# EAGLE board DAq2017 (EAGLE 7.2.0)
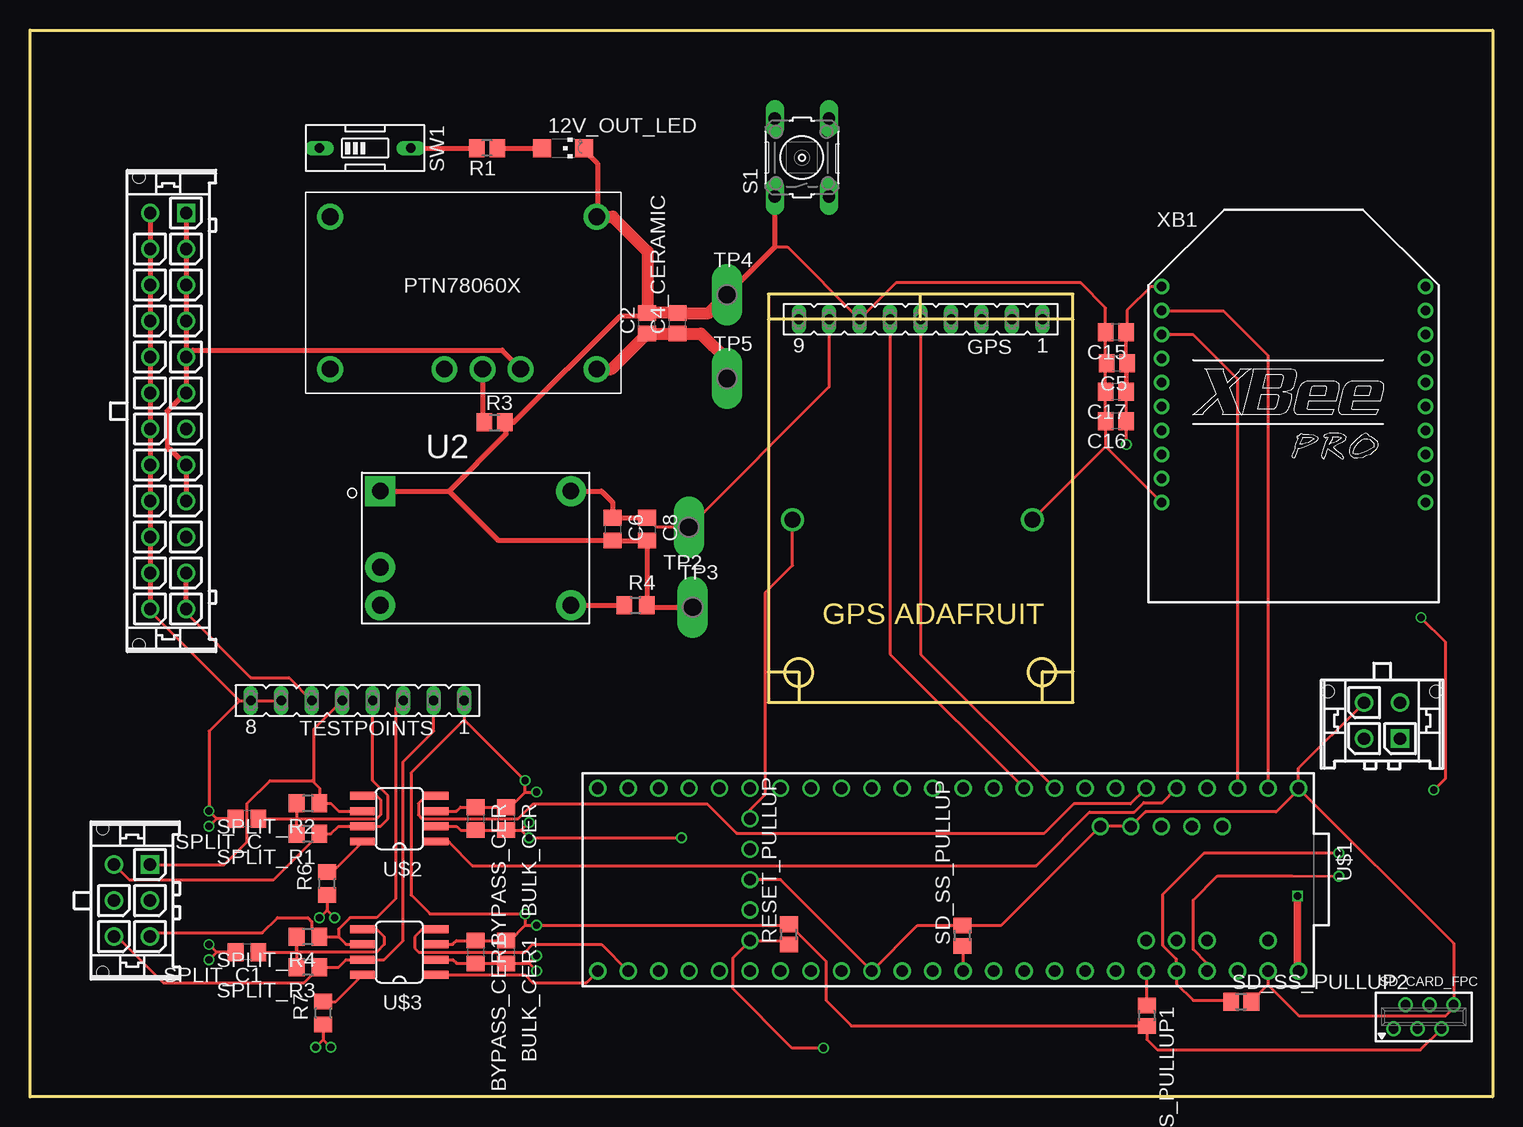
[diagram p0: board, top side]
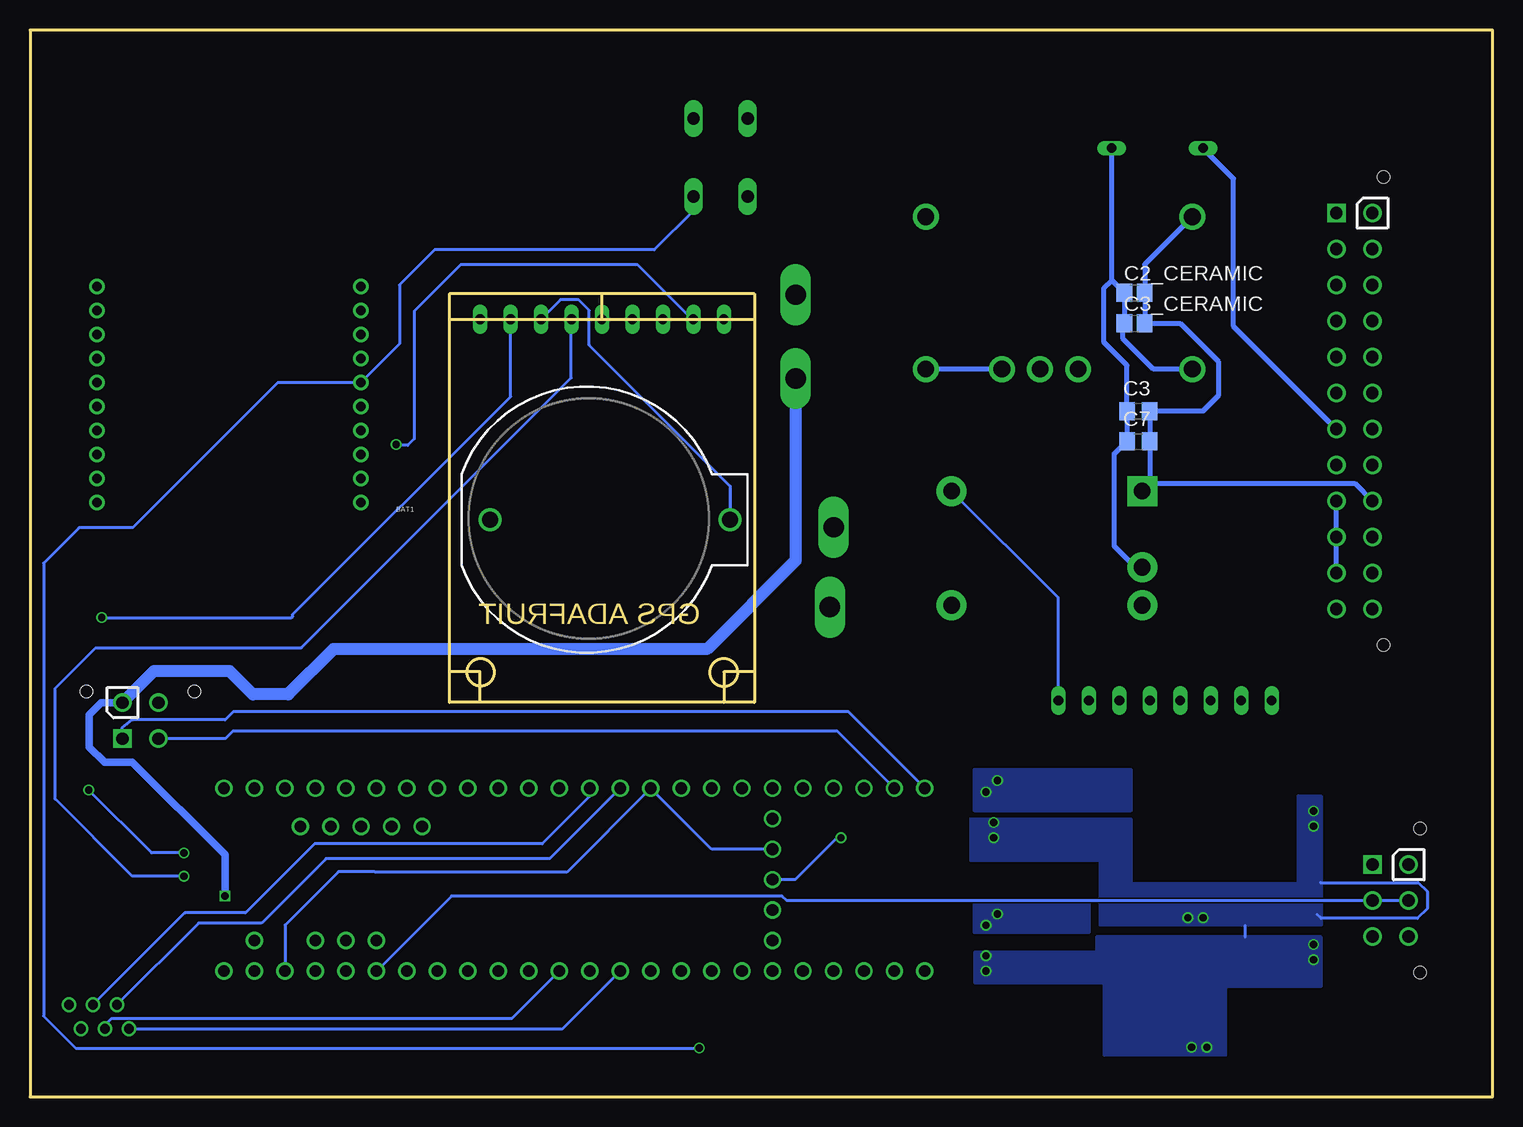
[diagram p1: board, bottom side, seen from below]

Size 121.92 x 88.9 mm. Coordinates in mm from the lower left corner, seen from the top.
Outline: 61.54,64.8 61.54,66.9 74.24,66.9
Outline: 61.54,64.8 61.54,32.87 86.94,32.87 86.94,64.8
Outline: 86.94,64.8 86.94,66.9 74.24,66.9
Outline: 86.94,64.8 61.54,64.8
Outline: 74.24,64.77 74.24,66.9
Outline: 84.4,32.89 84.4,35.43 86.94,35.43
Outline: 61.54,35.41 64.08,35.41 64.08,32.87
Outline: 0,0 0,88.9 121.92,88.9 121.92,0 0,0
Outline: circle at 64.08,35.36 radius 1.14
Outline: circle at 84.35,35.38 radius 1.14
Copper layers (1*16): Top 0.035mm / dielectric 1.5mm / Bottom 0.035mm
Design rules "PCB_Power": minimum track width 5mil, minimum drill 10mil, track to track 5mil, track to pad 5mil, pad to pad 5mil, via to via 5mil, smd to smd 5mil, copper to edge 10mil, drill to drill 6mil, minimum pad ring 5mil, minimum via ring 5mil, stop-mask expansion 3mil, vias tented up to drill 0mil, thermal gap 10mil

## Footprints (pad centres in the part's own frame; a part is rotated, then mirrored left to right if it is on the bottom)
CHIPLED_1206 = smd 1.5 x 1.5: A 0,-1.75; C 0,1.75
BATTCOM_20MM_PTH = drill 1.3: 1 11.85,0; 2 -8.15,0
C0805 = smd 1.3 x 1.5: 1 -0.95,0; 2 0.95,0
C0805' = smd 1.3 x 1.5: 1 -0.85,0; 2 0.85,0
FE09 = drill 0.813 long: 1 -10.16,0; 2 -7.62,0; 3 -5.08,0; 4 -2.54,0; 5 0,0; 6 2.54,0; 7 5.08,0; 8 7.62,0; 9 10.16,0
43045-0612 = drill 1.02 square: P$1 3,0 | drill 1.02: P$2 0,0; P$3 -3,0; P$4 3,3; P$5 0,3; P$6 -3,3 | hole 1.02: 6,3.94; -6,3.94
43045-0412 = drill 1.02 square: P$1 1.5,0 | drill 1.02: P$2 -1.5,0; P$3 1.5,3; P$4 -1.5,3 | hole 1.02: 4.5,3.94; -4.5,3.94
43045-2412 = drill 1.02 square: P$1 16.5,0 | drill 1.02: P$2 13.5,0; P$3 10.5,0; P$4 7.5,0; P$5 4.5,0; P$6 1.5,0; P$7 -1.5,0; P$8 -4.5,0; P$9 -7.5,0; P$10 -10.5,0; P$11 -13.5,0; P$12 -16.5,0; P$13 16.5,3; P$14 13.5,3; P$15 10.5,3; P$16 7.5,3; P$17 4.5,3; P$18 1.5,3; P$19 -1.5,3; P$20 -4.5,3; P$21 -7.5,3; P$22 -10.5,3; P$23 -13.5,3; P$24 -16.5,3 | hole 1.02: 19.5,3.94; -19.5,3.94
R0805 = smd 1.3 x 1.5: 1 -0.85,0; 2 0.85,0
R0805' = smd 1.3 x 1.5: 1 -0.95,0; 2 0.95,0
B3F-10XX = drill 1.016 long: 1 -3.251,2.261; 2 3.251,2.261; 3 -3.251,-2.261; 4 3.251,-2.261
FH21-6S-1DSA = drill 0.813: 1 -2.5,-1; 2 -1.5,1; 3 -0.5,-1; 4 0.5,1; 5 1.5,-1; 6 2.5,1
EDG-01 = drill 0.813 long: 1 0,-3.81; 2 0,3.81
FE08 = drill 0.813 long: 1 -8.89,0; 2 -6.35,0; 3 -3.81,0; 4 -1.27,0; 5 1.27,0; 6 3.81,0; 7 6.35,0; 8 8.89,0
P1-17Y = drill 1.702 pad 2.121 long: TP 0,0
TI_PTN78000WAH = drill 1.4 pad 2.5 square: 1 -7.94,4.763 | drill 1.4 pad 2.5: 2 -7.94,-1.587; 3 -7.94,-4.763; 4 7.94,-4.763; 5 7.94,4.763
TEENSY_3.6_ALL_PINS = drill 0.965: 0 -7.62,25.4; 1 -7.62,22.86; 2 -7.62,20.32; 3 -7.62,17.78; 3.3V 7.62,22.86; 3.3V3 -7.62,-7.62; 3.3V4 -2.54,-17.78; 4 -7.62,15.24; 5 -7.62,12.7; 6 -7.62,10.16; 7 -7.62,7.62; 8 -7.62,5.08; 9 -7.62,2.54; 10 -7.62,0; 11 -7.62,-2.54; 12 -7.62,-5.08; 13 7.62,-5.08; 14/A0 7.62,-2.54; 15/A1 7.62,0; 16/A2 7.62,2.54; 17/A3 7.62,5.08; 18/A4 7.62,7.62; 19/A5 7.62,10.16; 20/A6 7.62,12.7; 21/A7 7.62,15.24; 22/A8 7.62,17.78; 23/A9 7.62,20.32; 24 -7.62,-10.16; 25 -7.62,-12.7; 26 -7.62,-15.24; 27 -7.62,-17.78; 28 -7.62,-20.32; 29 -7.62,-22.86; 30 -7.62,-25.4; 31/A12 -7.62,-27.94; 32/A13 -7.62,-30.48; 33/A14 7.62,-30.48; 34/A15 7.62,-27.94; 35/A16 7.62,-25.4; 36/A17 7.62,-22.86; 37/A18 7.62,-20.32; 38/A19 7.62,-17.78; 39/A20 7.62,-15.24; A10 5.08,17.78; A11 5.08,15.24; A21 7.62,-12.7; A22 7.62,-10.16; AGND 7.62,25.4; AREF 5.08,20.32; D+ -4.445,16.51; D- -4.445,19.05; GND -7.62,27.94; GND1 7.62,-7.62; GND3 -4.445,13.97; GND4 -4.445,11.43; GND6 0,-17.78; PGM 2.54,-17.78; RESET 5.08,-17.78; VBAT -5.08,-17.78; VIN 7.62,27.94; VUSB 5.08,25.4; VUSB1 -4.445,21.59
SO8 = smd 0.66 x 2.032: 1 -1.905,-3.073; 2 -0.635,-3.073; 3 0.635,-3.073; 4 1.905,-3.073; 5 1.905,3.073; 6 0.635,3.073; 7 -0.635,3.073; 8 -1.905,3.073
PTN78060X_TH = drill 1.397 pad 2.159: 1 -11.176,6.35; 2 -11.176,-6.35; 3 -1.651,-6.35; 4 1.524,-6.35; 5 4.699,-6.35; 6 11.049,-6.35; 7 11.049,6.35
XBEE-PRO = drill 0.8 pad 1.27: 1 -11,9; 2 -11,7; 3 -11,5; 4 -11,3; 5 -11,1; 6 -11,-1; 7 -11,-3; 8 -11,-5; 9 -11,-7; 10 -11,-9; 11 11,-9; 12 11,-7; 13 11,-5; 14 11,-3; 15 11,-1; 16 11,1; 17 11,3; 18 11,5; 19 11,7; 20 11,9

## Placement (x,y rotation side)
12V_OUT_LED  [CHIPLED_1206]  44.45,79.06 270 top
BAT1  [BATTCOM_20MM_PTH]  75.41,48.09 0 bottom
BULK_CER  10uF  [C0805]  39.69,23.18 270 top
BULK_CER1  10uF  [C0805]  39.69,12.06 270 top
BYPASS_CER  100nF  [C0805]  37.15,23.18 270 top
BYPASS_CER1  100nF  [C0805]  37.15,12.06 270 top
C2  100uF  [C0805']  51.44,64.45 90 top
C2_CERAMIC  2.2uF  [C0805']  29.84,66.99 0 bottom
C3  2.2uF  [C0805]  29.53,57.15 0 bottom
C3_CERAMIC  1uF  [C0805']  29.84,64.45 0 bottom
C4_CERAMIC  2.2uF  [C0805']  53.98,64.45 90 top
C5  1uF  [C0805']  90.61,61.11 180 top
C6  100uF  [C0805]  48.58,47.31 270 top
C7  1uF  [C0805]  29.53,54.61 0 bottom
C8  2.2uF  [C0805]  51.44,47.31 270 top
C15  8.2pF  [C0805']  90.51,63.71 180 top
C16  100nF  [C0805']  90.51,56.31 180 top
C17  100nF  [C0805']  90.51,58.76 180 top
GPS  [FE09]  74.24,64.8 180 top
HARNESS  [43045-0612]  10,16.36 90 top
LCD  [43045-0412]  112.71,29.84 0 top
POWER_CONNECTOR  [43045-2412]  13.02,57.15 90 top
R1  1k  [R0805]  38.1,79.06 180 top
R3  21k  [R0805]  38.73,56.2 0 top
R4  78.7k  [R0805']  50.48,40.96 0 top
R6  4K7  [R0805']  24.77,17.78 90 top
R7  4K7  [R0805']  24.45,6.99 90 top
RESET_PULLUP  4K7  [R0805]  63.26,13.53 90 top
S1  [B3F-10XX]  64.35,78.27 90 top
SD_CARD_FPC  FH21-6S-1DSA  [FH21-6S-1DSA]  116.17,6.67 0 top
SD_SS_PULLUP  4K7  [R0805]  77.72,13.43 90 top
SD_SS_PULLUP1  4K7  [R0805]  93.09,6.76 270 top
SD_SS_PULLUP2  4K7  [R0805]  100.97,7.94 0 top
SPLIT_C  4n7F  [C0805]  18.1,23.18 180 top
SPLIT_C1  4n7F  [C0805]  18.1,12.06 180 top
SPLIT_R1  60E  [R0805']  23.18,21.91 180 top
SPLIT_R2  60E  [R0805']  23.18,24.45 180 top
SPLIT_R3  60E  [R0805']  23.18,10.79 180 top
SPLIT_R4  60E  [R0805']  23.18,13.34 180 top
SW1  [EDG-01]  27.94,79.06 270 top
TESTPOINTS  [FE08]  27.3,33.02 180 top
TP2  TPPAD1-17Y  [P1-17Y]  54.93,47.47 180 top
TP3  TPPAD1-17Y  [P1-17Y]  55.24,40.8 0 top
TP4  TPPAD1-17Y  [P1-17Y]  58.1,66.83 0 top
TP5  TPPAD1-17Y  [P1-17Y]  58.1,59.85 0 top
U2  PTN78000WAH  [TI_PTN78000WAH]  37.15,45.72 0 top
U$1  TEENSY_3.6_ALL_PINS  [TEENSY_3.6_ALL_PINS]  77.8,18.09 270 top
U$2  SN65HVD230/1  [SO8]  30.8,23.18 90 top
U$3  SN65HVD230/1  [SO8]  30.8,12.06 90 top
U$4  PTN78060XTH  [PTN78060X_TH]  36.2,66.99 0 top
XB1  XBEE-PRO  [XBEE-PRO]  105.34,58.52 0 top

## Library data of the parts
12V_OUT_LED = led
BAT1 = SparkFun-Electromechanical
BULK_CER BULK_CER1 BYPASS_CER BYPASS_CER1 R6 R7 SPLIT_C SPLIT_C1 SPLIT_R1-SPLIT_R4 = LV
C2 C2_CERAMIC C3_CERAMIC C4_CERAMIC R1 R3 RESET_PULLUP SD_SS_PULLUP SD_SS_PULLUP1 SD_SS_PULLUP2 = resistor
C3 C6-C8 R4 = rcl
C5 C15-C17 = Ediff+DAQ_v2
GPS TESTPOINTS = con-lsta; OC_FARNELL: unknown; OC_NEWARK: unknown
HARNESS LCD POWER_CONNECTOR = con-molex-micro-fit-3_0
S1 = switch-omron; MPN: B3F-1000; OC_FARNELL: 176432; OC_NEWARK: 36M3542
SD_CARD_FPC = con-hirose; OC_FARNELL: unknown; OC_NEWARK: unknown
SW1 = special
TP2-TP5 = testpad
U2 = PTN78000WAH; MPN: PTN78000WAH; OC_FARNELL: 1564908; OC_NEWARK: 65J6317; PACKAGE: Through-Hole Module; SUPPLIER: TEXAS INSTRUMENTS
U$1 = Teensy_3_and_LC_Series_Boards_v1.4
U$2 U$3 = texas_1
U$4 = PTN780XX
XB1 = Ediff+DAQ_v2; MPN: XBP24-AWI-001; OC_FARNELL: 1337916; OC_NEWARK: 42M2667

## Nets
3.3V: U$1.3.3V U$1.3.3V3 U$1.3.3V4
3V3: BULK_CER1.1 BULK_CER.1 BYPASS_CER1.1 BYPASS_CER.1 C5.1 C6.1 C8.1 C15.1 C16.1 C17.1 GPS.8 RESET_PULLUP.2 SD_CARD_FPC.5 SD_SS_PULLUP1.2 TESTPOINTS.1 TP2.TP U2.5 U$2.3 U$3.3 XB1.1
3V3_OUT_GPS: GPS.1
5V: C2.1 C4_CERAMIC.1 LCD.P$3 POWER_CONNECTOR.P$1 POWER_CONNECTOR.P$2 POWER_CONNECTOR.P$3 POWER_CONNECTOR.P$4 POWER_CONNECTOR.P$5 POWER_CONNECTOR.P$6 POWER_CONNECTOR.P$8 POWER_CONNECTOR.P$9 POWER_CONNECTOR.P$10 POWER_CONNECTOR.P$11 POWER_CONNECTOR.P$12 TESTPOINTS.6 TP5.TP U$1.VIN U$4.5 U$4.6
12V: C2_CERAMIC.1 C3.1 C3_CERAMIC.1 C7.1 R1.2 SW1.2 U2.2 U$4.2
12V_IN: POWER_CONNECTOR.P$7 SW1.1
AREF: U$1.AREF
GND: 12V_OUT_LED.C BAT1.2 BULK_CER1.2 BULK_CER.2 BYPASS_CER1.2 BYPASS_CER.2 C2.2 C2_CERAMIC.2 C3.2 C3_CERAMIC.2 C4_CERAMIC.2 C5.2 C6.2 C7.2 C8.2 C15.2 C16.2 C17.2 GPS.7 LCD.P$4 POWER_CONNECTOR.P$13 POWER_CONNECTOR.P$14 POWER_CONNECTOR.P$15 POWER_CONNECTOR.P$16 POWER_CONNECTOR.P$17 POWER_CONNECTOR.P$18 POWER_CONNECTOR.P$19 POWER_CONNECTOR.P$20 POWER_CONNECTOR.P$21 POWER_CONNECTOR.P$22 POWER_CONNECTOR.P$23 POWER_CONNECTOR.P$24 R3.2 R4.2 R6.1 R7.1 S1.1 SD_CARD_FPC.6 SD_SS_PULLUP2.2 SD_SS_PULLUP.2 SPLIT_C1.2 SPLIT_C.2 TESTPOINTS.7 TESTPOINTS.8 TP3.TP TP4.TP U2.1 U$1.AGND U$1.GND U$1.GND1 U$1.GND3 U$1.GND4 U$1.GND6 U$2.2 U$3.2 U$4.1 U$4.7 XB1.10
GPS_EN: GPS.2 SD_SS_PULLUP2.1 U$1.22/A8
GPS_FIX: GPS.4 U$1.23/A9
GPS_PPS: GPS.9
GPS_RX: GPS.6 U$1.8
GPS_TX: GPS.5 U$1.7
LCD_RX: LCD.P$1 U$1.32/A13
LCD_TX: LCD.P$2 U$1.31/A12
LULZ: R6.2 U$2.8
MC_CAN_H: HARNESS.P$6 SPLIT_R3.1 TESTPOINTS.2 U$3.7
MC_CAN_L: HARNESS.P$3 SPLIT_R4.1 TESTPOINTS.3 U$3.6
MC_RX: U$1.34/A15 U$3.4
MC_TX: U$1.33/A14 U$3.1
N$2: R3.1 U$4.4
N$3: R4.1 U2.4
N$5: 12V_OUT_LED.A R1.1
N$6: R7.2 U$3.8
N$7: SPLIT_C1.1 SPLIT_R3.2 SPLIT_R4.2 U$3.5
N$9: SPLIT_C.1 SPLIT_R1.2 SPLIT_R2.2 U$2.5
RESET: RESET_PULLUP.1 S1.3 U$1.RESET XB1.5
RESET_CAN_NODE: HARNESS.P$5 SD_SS_PULLUP1.1 U$1.21/A7
RTC: BAT1.1 GPS.3 U$1.VBAT
SD_MISO: SD_CARD_FPC.2 U$1.12
SD_MOSI: SD_CARD_FPC.4 U$1.11
SD_SCLK: SD_CARD_FPC.1 U$1.13
SD_SS: SD_CARD_FPC.3 SD_SS_PULLUP.1 U$1.15/A1
SENSOR_CAN_H: HARNESS.P$4 SPLIT_R1.1 TESTPOINTS.4 U$2.7
SENSOR_CAN_L: HARNESS.P$1 SPLIT_R2.1 TESTPOINTS.5 U$2.6
SENSOR_RX: U$1.4 U$2.4
SENSOR_TX: U$1.3 U$2.1
SLEEP_OUT: XB1.13
VUSB: U$1.VUSB
VUSB1: U$1.VUSB1
XBEE_RX: U$1.1 XB1.3
XBEE_TX: U$1.0 XB1.2

## Tracks (layer width: path | path; a pad name or v marks a point on that pad's centre or on a via)
3.3V
  Bottom 0.254: U$1.3.3V4 65.1,20.63 U$1.3.3V3 77.16,18.73 93.19,18.73 93.22,18.76 96.2,18.76 100.66,14.3 U$1.3.3V
3V3  (via drill 0.6)
  Top 0.254: U$2.3 35.56,23.81 35.88,24.13 BYPASS_CER.1 BULK_CER.1 40,24.13 41.27,25.4 | 41.27,25.4 v42.23,25.4 | 41.27,25.4 v41.27,26.35 36.2,31.43 | U$3.3 35.24,12.7 35.56,13.02 BYPASS_CER1.1 BULK_CER1.1 40,13.02 41.27,14.29 | 41.27,14.29 v41.27,15.24 33.34,15.24 31.75,16.83 31.75,26.99 36.2,31.43 | 41.27,14.29 v42.23,14.29 63.17,14.29 RESET_PULLUP.2 66.36,11.28 66.36,8.03 68.48,5.91 SD_SS_PULLUP1.2 93.09,4.79 93.98,3.9 115.91,3.9 SD_CARD_FPC.5 | TESTPOINTS.1 36.2,31.43 | C15.1 91.36,61.2 C5.1 91.46,58.85 C17.1 | C17.1 C16.1 91.41,56.27 v91.41,54.36 | GPS.8 66.62,59.16 TP2.TP 52.23,47.47 C8.1 | C17.1 C15.1 | 90.93,64.14 C15.1 | XB1.1 93.42,67.52 91.44,65.53 91.44,63.79 C15.1
  Top 0.406: C8.1 C6.1 48.58,49.53 47.62,50.48 U2.5
  Bottom 0.254: TESTPOINTS.1 36.2,41.59 U2.5 | GPS.8 66.73,64.8 71.28,69.34 86.01,69.34 89.88,65.47 89.88,54.83 90.42,54.29 91.34,54.29 v91.41,54.36
  pour Bottom: 30.16,23.81 43.18,23.81 43.18,27.3 30.16,27.3
  pour Bottom: 33.66,17.78 33.66,13.65 43.18,13.65 43.18,17.78
5V  (via drill 0.6)
  Top 0.254: POWER_CONNECTOR.P$12 13.02,40.32 18.41,34.92 21.59,34.92 TESTPOINTS.6
  Top 0.406: POWER_CONNECTOR.P$1 POWER_CONNECTOR.P$2 POWER_CONNECTOR.P$3 POWER_CONNECTOR.P$4 POWER_CONNECTOR.P$5 | POWER_CONNECTOR.P$5 POWER_CONNECTOR.P$6 12.93,58.65 11.43,57.15 11.43,53.98 11.69,53.98 POWER_CONNECTOR.P$8 POWER_CONNECTOR.P$9 | POWER_CONNECTOR.P$12 POWER_CONNECTOR.P$11 | POWER_CONNECTOR.P$5 13.6,62.23 39.37,62.23 40.89,60.71 U$4.5 | TP5.TP
  Top 0.61: U$1.VIN 105.66,10.55 v105.66,16.73
  Top 1.016: U$4.6 48.48,60.64 C2.1 C4_CERAMIC.1 55.94,63.6 58.13,61.4 58.13,59.88 TP5.TP
  Bottom 0.406: POWER_CONNECTOR.P$11 POWER_CONNECTOR.P$10 POWER_CONNECTOR.P$9 | U$4.5 U$4.6
  Bottom 0.61: v105.66,16.73 105.66,20.16 113.38,27.88 115.7,27.88 116.97,29.15 116.97,31.84 115.98,32.83 114.23,32.83 LCD.P$3
  Bottom 1.016: TP5.TP 58.1,44.7 65.5,37.31 96.61,37.31 100.39,33.53 103.35,33.53 105.28,35.47 111.59,35.47 LCD.P$3
12V
  Top 0.406: SW1.2 R1.2
  Bottom 0.406: 31.75,68.05 C2_CERAMIC.1 C3_CERAMIC.1 | 31.75,68.05 SW1.2 | 30.48,64.23 C3_CERAMIC.1 | 31.75,68.05 32.38,67.41 32.38,62.87 30.48,60.96 C3.1 C7.1 31.56,53.53 31.56,45.91 29.78,44.13 U2.2 | U$4.2 28.26,60.64 30.8,63.18 30.8,64.35 C3_CERAMIC.1
12V_IN
  Bottom 0.406: POWER_CONNECTOR.P$7 21.59,64.22 21.59,76.52 SW1.1
GND  (via drill 0.6)
  Top 0.254: BYPASS_CER.2 35.88,22.23 35.56,22.54 U$2.2 | BYPASS_CER.2 BULK_CER.2 | 15.56,23.18 v14.92,23.81 14.92,30.48 17.46,33.02 | SPLIT_C.2 15.56,23.18 | 15.56,23.18 v14.92,22.54 | 24.77,15.56 v24.13,14.92 | R6.1 24.77,15.56 | 24.77,15.56 v25.4,14.92 | BULK_CER1.2 BYPASS_CER1.2 | BYPASS_CER1.2 35.56,11.11 35.24,11.43 U$3.2 | SPLIT_C1.2 15.56,12.06 | v14.92,12.7 15.56,12.06 | 15.56,12.06 v14.92,11.43 | R7.1 24.45,4.76 | v23.81,4.13 24.45,4.76 | 24.45,4.76 v25.08,4.13 | BYPASS_CER.2 40.96,22.23 | v41.59,22.86 40.96,22.23 | 40.96,22.23 v41.59,21.59 v54.32,21.59 | BYPASS_CER1.2 41.59,11.11 | v42.23,11.75 41.59,11.11 | 41.59,11.11 v42.23,10.48 | POWER_CONNECTOR.P$24 10.02,40.47 17.46,33.02 | 17.46,33.02 TESTPOINTS.8 TESTPOINTS.7 | 62.09,70.82 63.14,70.82 GPS.7 72.19,67.82 87.6,67.82 89.66,65.75 C15.2 89.66,61.2 C5.2 89.66,61.02 C17.2 C16.2 89.66,54.2 | 89.66,54.2 XB1.10 | 89.66,54.2 89.66,54.19 BAT1.2 | U$1.GND 105.74,27.38 LCD.P$4 | U$1.GND 105.74,25.61 103.89,23.75 92.98,23.75 U$1.GND3 U$1.GND4 80.97,14.28 SD_SS_PULLUP.2 73.99,14.28 U$1.GND1 62.56,18.09 U$1.GND6 | 103.2,9.32 U$1.AGND 103.2,9.51 | 103.2,9.32 SD_SS_PULLUP2.2 | 103.2,9.32 105.79,6.74 105.79,6.73 117.98,6.73 118.67,7.42 SD_CARD_FPC.6 118.67,12.78 U$1.GND
  Top 0.406: POWER_CONNECTOR.P$13 POWER_CONNECTOR.P$14 POWER_CONNECTOR.P$15 POWER_CONNECTOR.P$16 POWER_CONNECTOR.P$17 POWER_CONNECTOR.P$18 POWER_CONNECTOR.P$19 POWER_CONNECTOR.P$20 POWER_CONNECTOR.P$21 POWER_CONNECTOR.P$22 POWER_CONNECTOR.P$23 POWER_CONNECTOR.P$24 | 12V_OUT_LED.C 46.2,78.89 47.31,77.79 47.31,73.41 U$4.7 | U2.1 34.92,50.48 | C2.2 51.22,65.09 49.21,65.09 40.32,56.2 R3.2 39.69,56.09 39.69,55.24 34.92,50.48 | 34.92,50.48 39.05,46.36 C6.2 C8.2 R4.2 51.59,40.8 TP3.TP | TP4.TP 62.09,70.82 S1.1
  Top 1.016: U$4.7 48.58,73.34 51.5,70.42 51.5,65.37 | 51.5,65.37 C2.2 | 51.5,65.37 53.91,65.37 C4_CERAMIC.2 56.57,65.3 TP4.TP
  Bottom 0.254: 20.64,14.29 20.64,13.34 | 14.64,15.21 14.29,14.86 6.25,14.86 5.46,15.65 5.46,17.11 6.19,17.84 14.35,17.84 | U$1.GND6 58.13,18.1 54.64,21.59 v54.32,21.59
  Bottom 0.406: POWER_CONNECTOR.P$21 11.48,51.12 28.57,51.12 U2.1 28.58,51.11 C7.2 C3.2 24.13,57.15 22.86,58.42 22.86,61.28 26.04,64.45 C3_CERAMIC.2 C2_CERAMIC.2 29,69.37 U$4.1
  pour Bottom: 43.5,23.18 30.16,23.18 30.16,17.78 16.19,17.78 16.19,25.08 14.29,25.08 14.29,14.29 32.7,14.29 32.7,19.68 43.5,19.68
  pour Bottom: 14.29,13.34 33.02,13.34 33.02,12.06 43.18,12.06 43.18,9.53 32.38,9.53 32.38,3.49 22.23,3.49 22.23,9.21 14.29,9.21
GPS_EN  (via drill 0.6)
  Top 0.254: SD_SS_PULLUP2.1 100.02,8.03 96.97,8.03 95.58,9.41 U$1.22/A8 95.58,11.48 94.46,12.61 94.46,16.89 97.89,20.32 v109.09,20.32 | v115.95,39.94 117.98,37.91 117.98,26.51 v117.03,25.56
  Bottom 0.254: GPS.2 81.85,64.78 81.85,58.36 100.01,40.2 100.01,40.04 100.11,39.94 v115.95,39.94 | v117.03,25.56 111.79,20.32 v109.09,20.32
GPS_FIX  (via drill 0.6)
  Top 0.254: U$1.23/A9 98.12,11.13 96.97,12.29 96.97,16.38 99,18.41 105.22,18.41 v109.09,18.38
  Bottom 0.254: GPS.4 76.8,64.78 76.8,59.91 99.31,37.4 116.46,37.4 119.83,34.04 119.83,24.83 113.38,18.38 v109.09,18.38
GPS_RX
  Top 0.254: GPS.6 71.7,36.89 U$1.8
GPS_TX
  Top 0.254: GPS.5 74.24,36.89 U$1.7
LCD_RX
  Bottom 0.254: LCD.P$1 114.21,30.76 113.38,31.4 105.66,31.4 105,32.07 53.68,32.07 U$1.32/A13
LCD_TX
  Bottom 0.254: U$1.31/A12 54.6,30.45 105.03,30.45 105.63,29.84 LCD.P$2
LULZ
  Top 0.254: R6.2 25.18,18.73 U$2.8
MC_CAN_H
  Top 0.254: HARNESS.P$6 7.28,13.36 11.11,9.53 22.86,9.53 SPLIT_R3.1 25.72,10.79 26.35,11.43 U$3.7 29.53,11.43 31.11,13.02 31.11,27.94 33.66,30.48 TESTPOINTS.2
MC_CAN_L
  Top 0.254: 25.72,13.34 SPLIT_R4.1 23.5,13.97 23.5,14.61 23.18,14.92 20.64,14.92 19.37,13.65 10.3,13.65 HARNESS.P$3 | 25.72,13.34 26.35,12.7 U$3.6 | TESTPOINTS.3 30.48,32.38 30.48,16.51 28.89,14.92 26.67,14.92 25.72,13.97 25.72,13.34
MC_RX
  Top 0.254: U$3.4 32.7,13.97 32.07,13.34 32.07,12.38 32.38,12.06 41.27,12.06 41.91,12.7 47.63,12.7 U$1.34/A15
MC_TX
  Top 0.254: U$3.1 41.27,10.16 41.91,9.53 46.38,9.53 U$1.33/A14
N$2
  Top 0.406: U$4.4 37.72,56.36 R3.1
N$3
  Top 0.406: U2.4 R4.1
N$5
  Top 0.406: R1.1 12V_OUT_LED.A
N$6
  Top 0.254: R7.2 25.5,7.93 U$3.8
N$7
  Top 0.254: SPLIT_C1.1 22.23,12.06 SPLIT_R4.2 22.23,12.06 | 22.23,12.06 SPLIT_R3.2 | U$3.5 28.89,13.97 29.53,13.34 29.53,12.7 28.89,12.06 22.23,12.06
N$9
  Top 0.254: SPLIT_C.1 22.23,23.18 | 22.23,23.18 28.89,23.18 29.21,23.5 29.21,24.77 28.89,25.08 U$2.5 | SPLIT_R2.2 22.23,23.18 | SPLIT_R1.2 22.23,23.18
RESET  (via drill 0.6)
  Top 0.254: RESET_PULLUP.1 62.93,13.01 U$1.RESET 58.61,11.6 58.61,8.98 63.53,4.06 v66.14,4.06
  Bottom 0.254: S1.3 66.61,73.85 69.88,70.58 88.2,70.58 91.12,67.66 91.12,62.74 XB1.5 101.27,59.52 113.35,47.43 117.82,47.43 120.78,44.48 120.78,6.73 118.11,4.06 v66.14,4.06
RESET_CAN_NODE
  Top 0.254: U$1.21/A7 93.04,7.66 SD_SS_PULLUP1.1
  Bottom 0.254: U$1.21/A7 86.78,16.73 59.21,16.73 58.84,16.36 HARNESS.P$5
RTC
  Top 0.254: U$1.VBAT 60.02,23.92 61.31,25.21 61.31,42.04 63.56,44.29 BAT1.1
  Bottom 0.254: GPS.3 77.7,66.42 76.2,66.42 75.31,65.53 75.31,62.64 63.56,50.89 BAT1.1
SD_MISO
  Bottom 0.254: U$1.12 78.59,19.84 97.25,19.84 102.62,14.48 107.86,14.48 SD_CARD_FPC.2
SD_MOSI
  Bottom 0.254: U$1.11 75.26,25.04 79.22,21.08 98.2,21.08 103.95,15.34 109,15.34 SD_CARD_FPC.4
SD_SCLK
  Bottom 0.254: SD_CARD_FPC.1 77.53,5.67 U$1.13
SD_SS
  Top 0.254: U$1.15/A1 77.8,12.5 SD_SS_PULLUP.1
  Bottom 0.254: SD_CARD_FPC.3 115.67,5.99 115.13,6.54 81.73,6.54 U$1.15/A1
SENSOR_CAN_H
  Top 0.254: HARNESS.P$4 8.26,18.1 20.32,18.1 SPLIT_R1.1 25.08,21.91 25.72,22.54 U$2.7 29.21,22.54 29.84,23.18 29.84,25.08 28.57,26.35 TESTPOINTS.4
SENSOR_CAN_L
  Top 0.254: U$2.6 25.72,23.81 25.08,24.45 SPLIT_R2.1 24.13,25.72 23.65,26.19 | 23.65,26.19 23.5,26.35 20,26.35 18.1,24.45 18.1,21.27 16.18,19.36 HARNESS.P$1 | TESTPOINTS.5 23.65,30.64 23.65,26.19
SENSOR_RX
  Top 0.254: U$2.4 33.02,25.08 32.38,24.45 32.38,23.5 32.7,23.18 40.7,23.18 41.94,24.42 56.45,24.42 58.9,21.97 84.58,21.97 87.06,24.45 91.71,24.45 91.75,24.42 U$1.4
SENSOR_TX
  Top 0.254: U$2.1 34.92,21.27 34.92,21.21 36.86,19.27 83.88,19.27 88.33,23.72 92.04,23.72 92.84,24.51 94.38,24.51 U$1.3
XBEE_RX
  Top 0.254: U$1.1 100.65,25.73 100.65,59.85 97,63.5 94.36,63.5 XB1.3
XBEE_TX
  Top 0.254: U$1.0 103.19,25.73 103.19,61.78 99.5,65.47 94.39,65.47 XB1.2

## Text on the board
Dimension: GPS ADAFRUIT